# Altium PCB Sheet1.PcbDoc
Units mm, origin at the board's own origin, x right, y up, seen from the top; angles counter-clockwise.
Board outline 100 x 80.01 mm, 2 copper layers (Top Layer, Bottom Layer); 26 components, 36 nets, 136 pads, 13 vias.
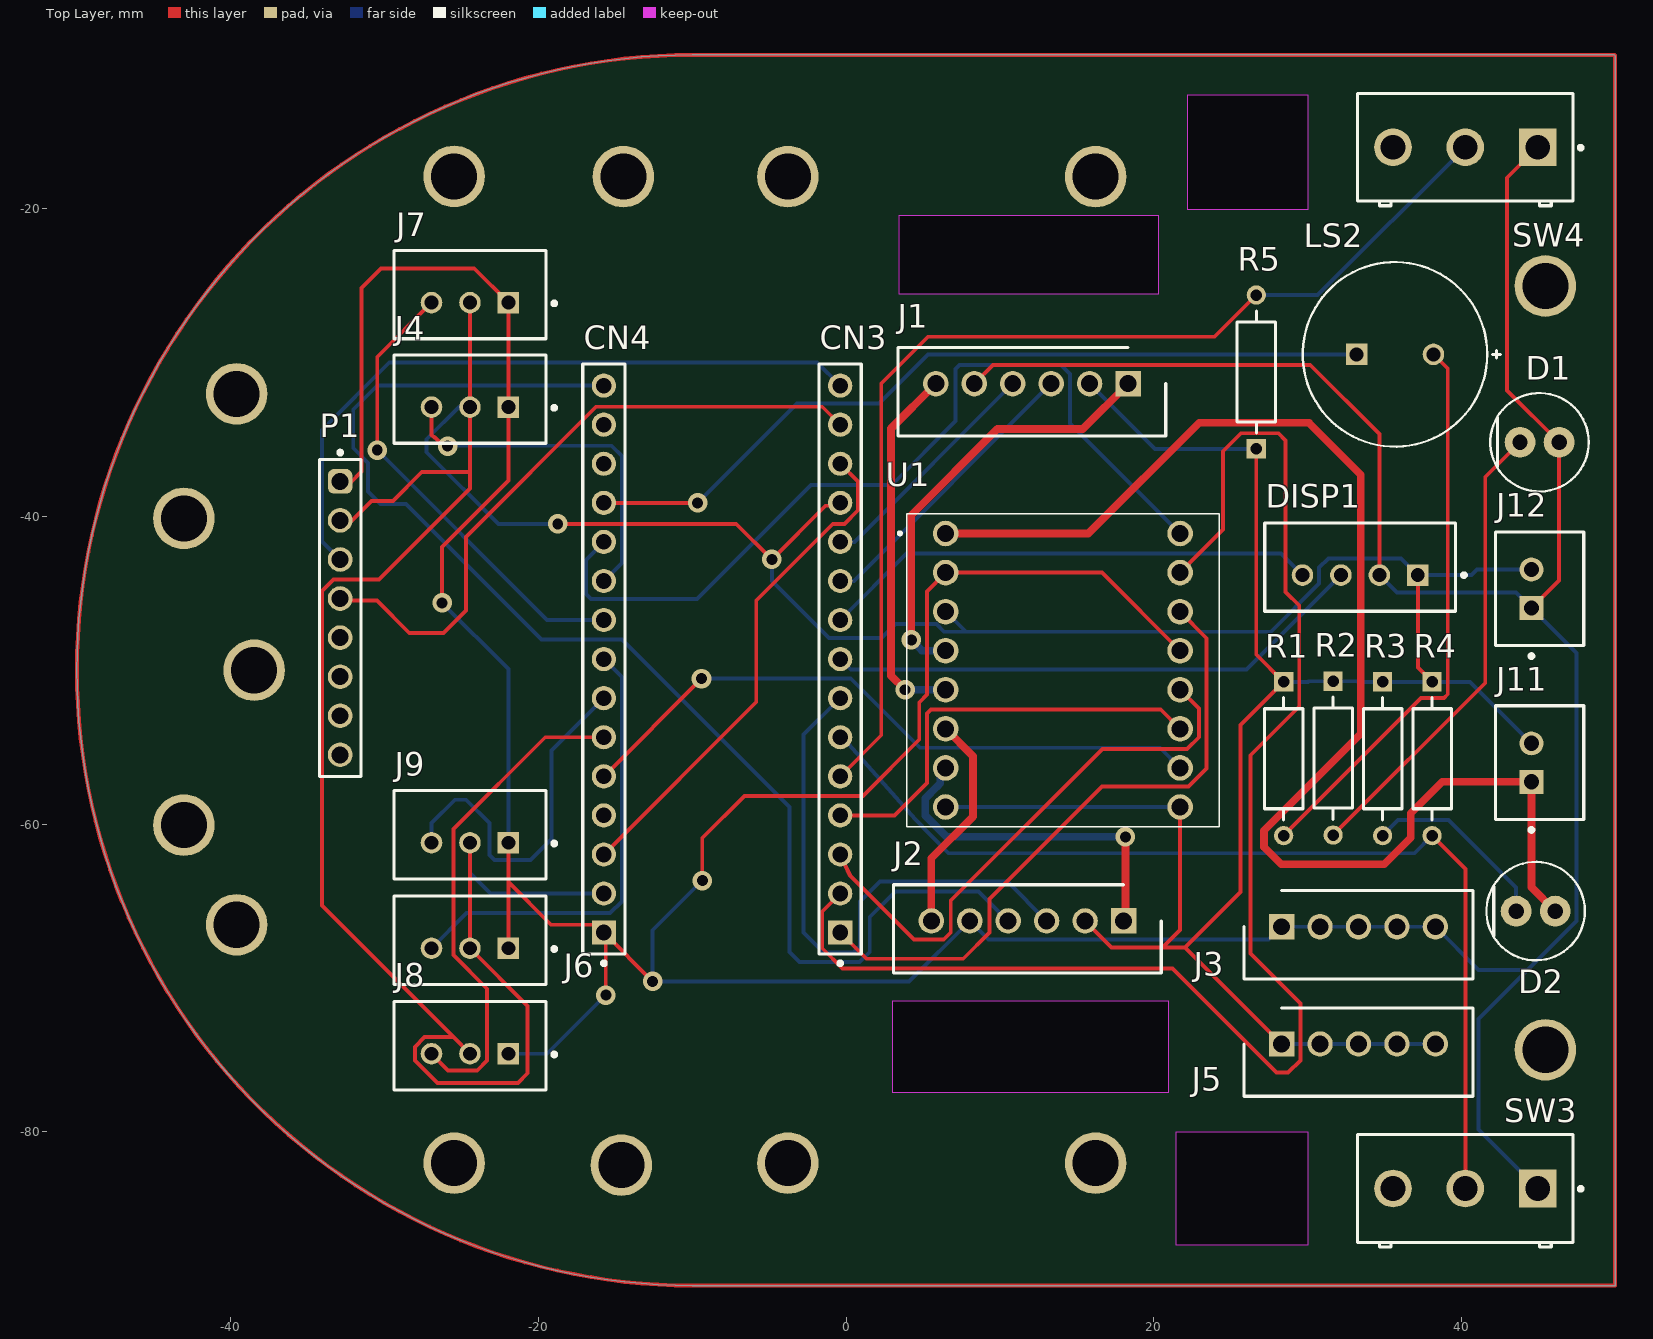
[diagram p0: Top Layer view]
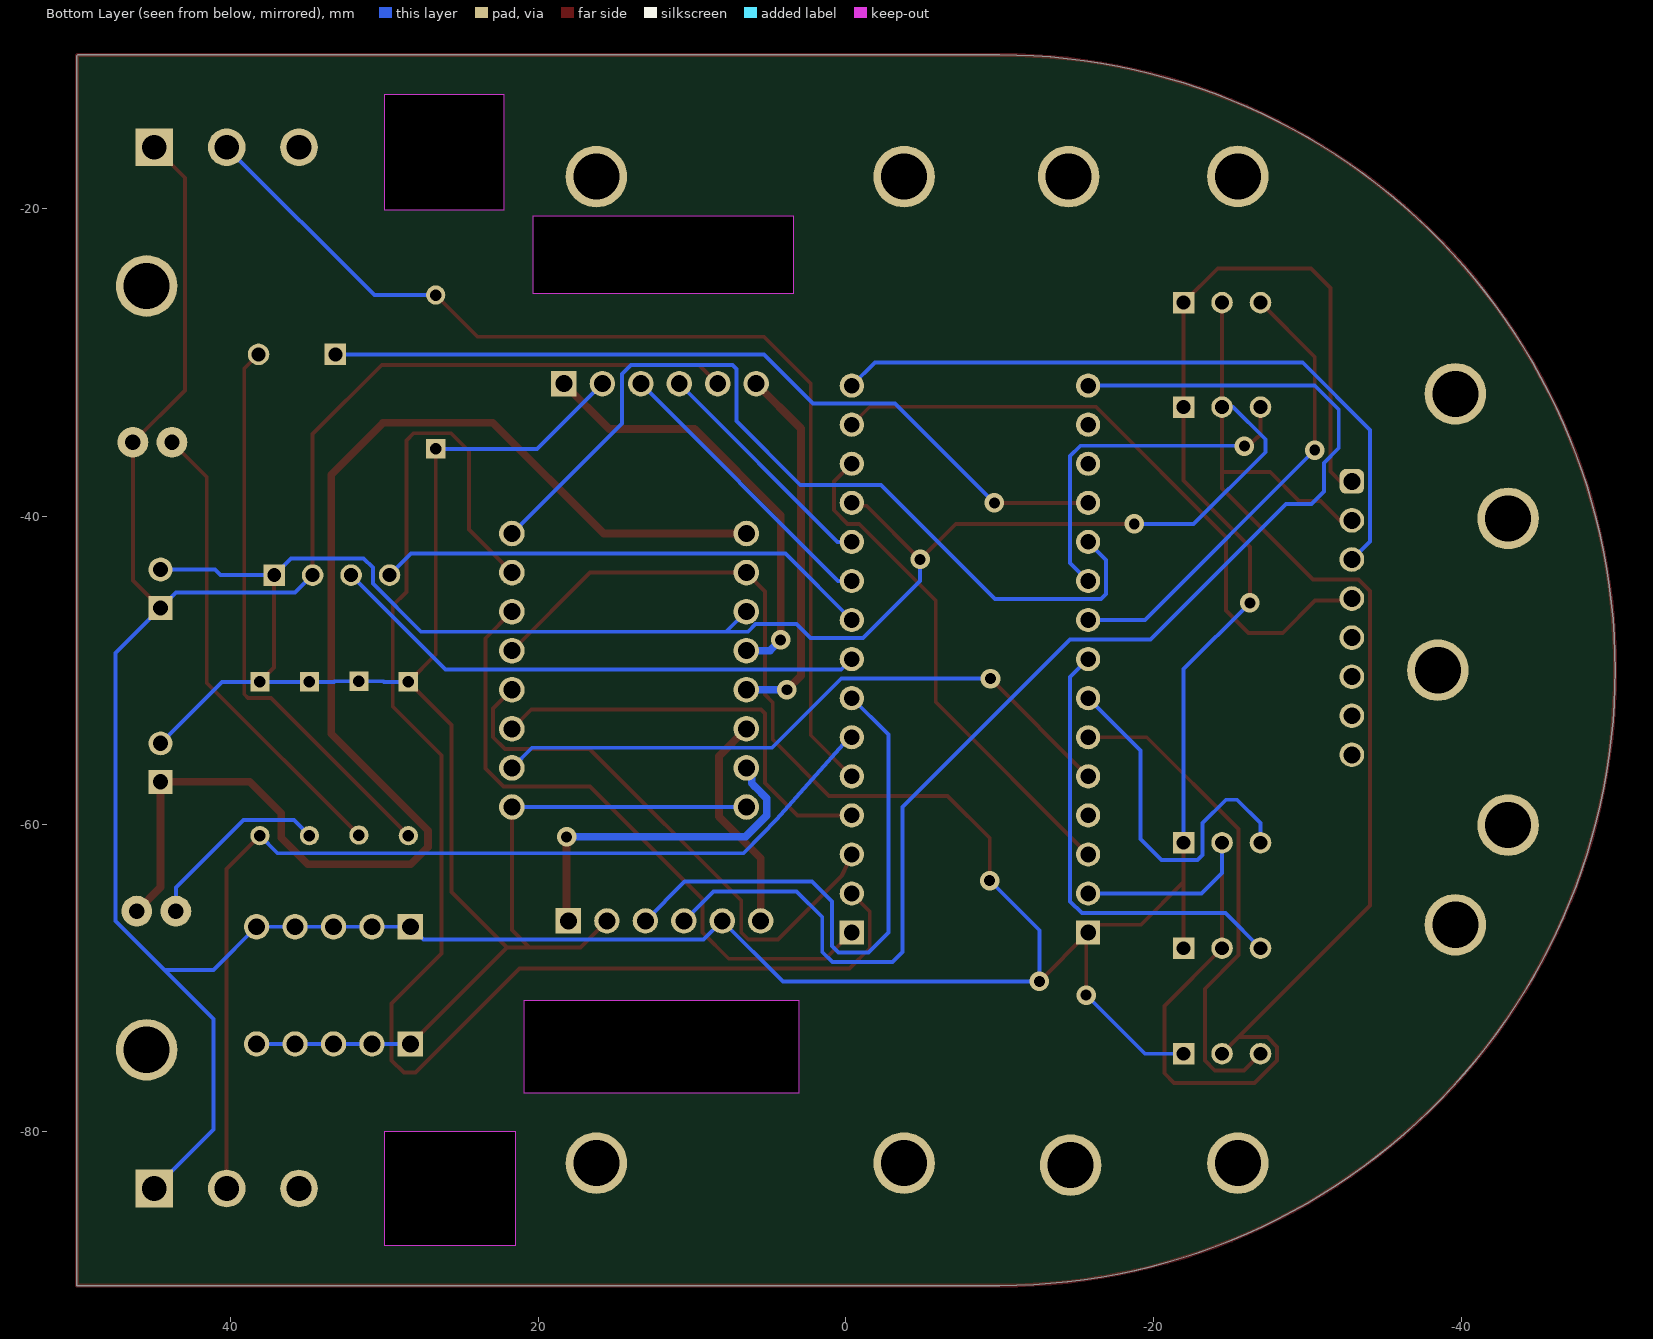
[diagram p1: Bottom Layer view, seen from below]
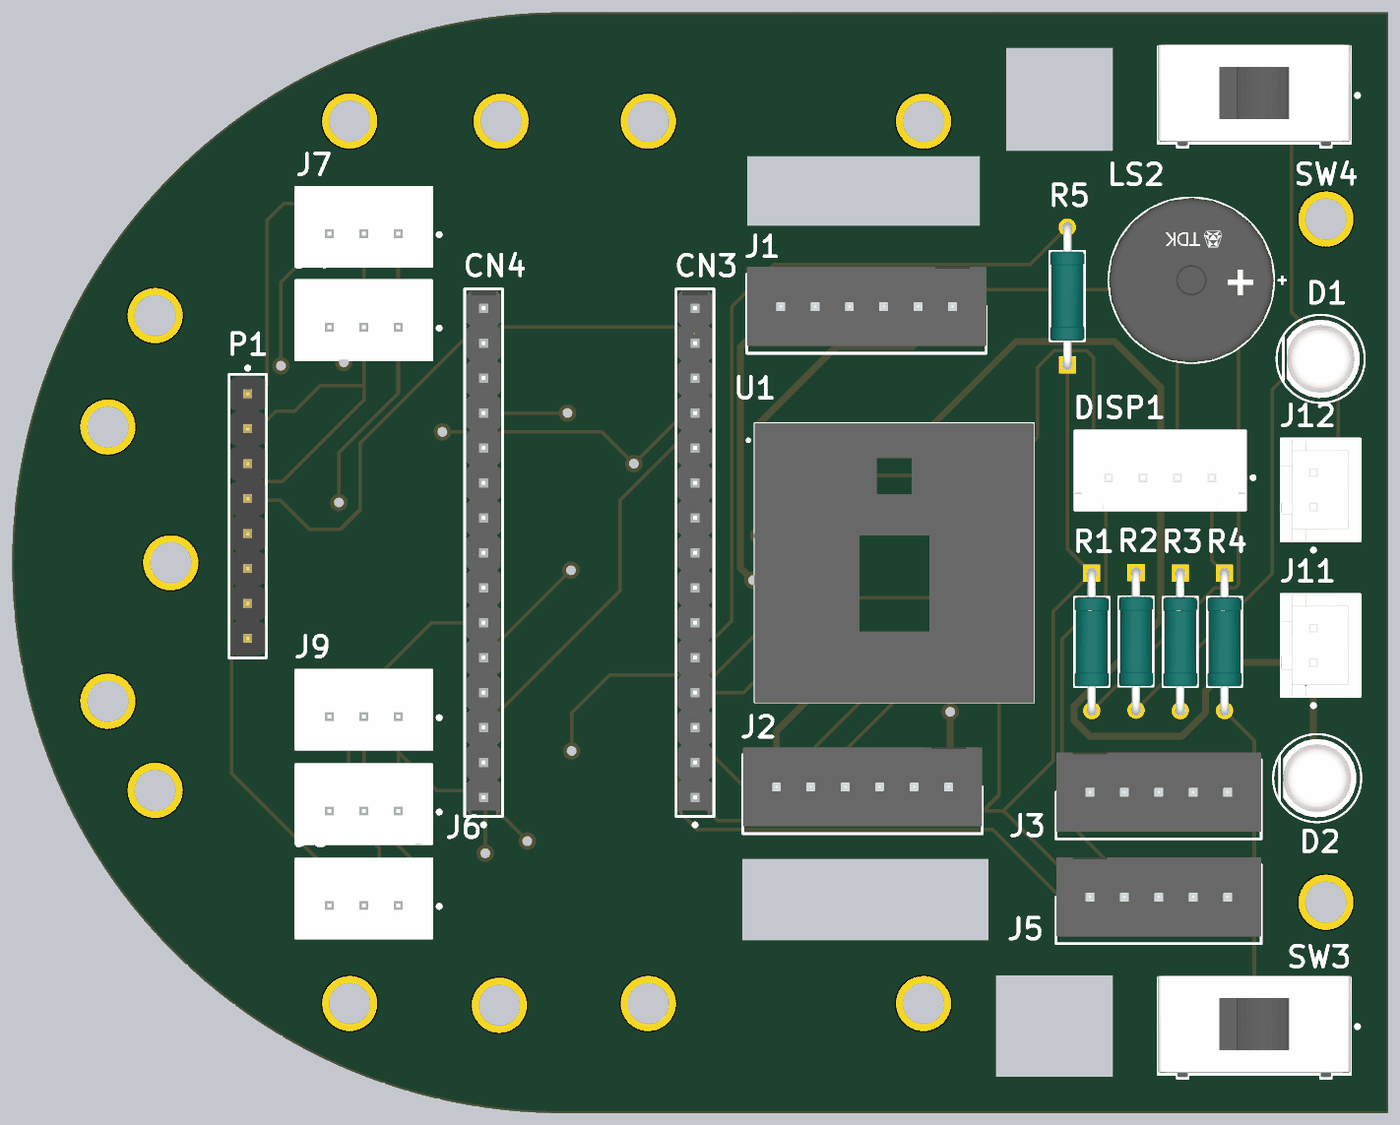
[diagram p2: 3D render of the assembled board from above, using the file's embedded part models]

## Layer stack, top to bottom
Top Solder: solder mask 0.0102, Solder Resist, Dk 3.5
Top Layer: signal copper 0.0356
Dielectric 1: dielectric 0.32, FR-4, Dk 4.8
Bottom Layer: signal copper 0.0356
Bottom Solder: solder mask 0.0102, Solder Resist, Dk 3.5

## Board outline
-50.006,-49.993 ccw(c-10.001,-49.999) -10.007,-90.005 49.993,-90.005 49.998,-90 49.998,-10.035 49.957,-9.994 -10,-9.994 -9.997,-9.994 ccw(c-10.002,-49.998)
cut-out: 21.463,-87.376 21.463,-80.01 30,-80.01 30,-87.376
cut-out: 3.048,-77.47 3.048,-71.501 20.955,-71.501 20.955,-77.47
cut-out: 3.429,-25.527 20.32,-25.527 20.32,-20.447 3.429,-20.447
cut-out: 22.225,-20.066 22.225,-12.573 30,-12.573 30,-20.066

## Design rules (kind name [scope] priority, off if disabled: settings)
Clearance [All] p1: gap=0.254 ignorepadtopadclearanceinfootprint=FALSE
PolygonConnect [All] p1: connectstyle=Relief reliefconductorwidth=0.254 reliefentries=4 polygonreliefangle="90 Angle" airgapwidth=0.254
RoutingVias [All] p1: holewidth=0.711 width=1.27 viastyle="Through Hole" minholewidth=0.711 minwidth=1.27 maxholewidth=0.711 maxwidth=1.27
SolderMaskExpansion Via [isViA] p1: expansion=0.102 istentingtop=TRUE
SolderMaskExpansion [All] p2: expansion=0.102 istentingtop=FALSE
Width [All] p1: maxlimit=0.5 minlimit=0.254 preferedwidth=0.254
30 further rules are at their usual default settings.

## Components (designator, comment, footprint, x,y, rotation, side; value= is the part's Value field where it differs from the comment)
CN3 "22-28-4157" FP-22-28-4157-MFG -0.381,-49.276 r90 top
CN4 "22-28-4157" FP-22-28-4157-MFG -15.748,-49.276 r90 top
D1 "SFH 4550" FP-SFH_4550-MFG 45.085,-35.179 r0 top
D2 "SFH 4550" FP-SFH_4550-MFG 44.831,-65.659 r0 top
DISP1 "B4B-XH-A(LF)(SN)" FP-B4B-XH-A_LF_SN-MFG 33.421,-43.29 r0 top
J1 "B6B-XH-A_LF__SN_" SHDR6W64P0X250_1X6_1740X575X700P 18.335,-31.369 r180 top
J2 "B6B-XH-A_LF__SN_" SHDR6W64P0X250_1X6_1740X575X700P 18.041,-66.294 r180 top
J3 "+5" SHDR5W64P0X250_1X5_1490X575X700P 28.314,-66.675 r180 top
J4 "3" FP-B3B-XH-A_LF_SN-MFG -24.451,-32.368 r180 top
J5 "GND" SHDR5W64P0X250_1X5_1490X575X700P 28.314,-74.295 r180 top
J6 "5" FP-B3B-XH-A_LF_SN-MFG -24.451,-67.547 r180 top
J7 "1" FP-B3B-XH-A_LF_SN-MFG -24.451,-25.575 r180 top
J8 "6" FP-B3B-XH-A_LF_SN-MFG -24.451,-74.405 r180 top
J9 "7" FP-B3B-XH-A_LF_SN-MFG -24.451,-60.689 r180 top
J11 "B2B-XH-A(LF)(SN)" FP-B2B-XH-A_LF_SN-MFG 45.085,-56.007 r90 top
J12 "B2B-XH-A(LF)(SN)" FP-B2B-XH-A_LF_SN-MFG 45.085,-44.704 r90 top
LS2 "SD1209T5-A1" FP-SD1209-MFG 35.687,-29.464 r0 top
P1 "61300811121" 61300811121 -32.893,-46.609 r270 top
R1 "R" FP-MRS25-MFG 28.448,-55.753 r270 top
R2 "MRS25000C9530FCT00" FP-MRS25-MFG 31.665,-55.716 r270 top
R3 "MRS25000C9530FCT00" FP-MRS25-MFG 34.883,-55.753 r270 top
R4 "MRS25000C9530FCT00" FP-MRS25-MFG 38.1,-55.753 r270 top
R5 "MRS25000C9530FCT00" FP-MRS25-MFG 26.67,-30.607 r90 top
SW3 "CS12ANW03" FP-CS12ANW03-MFG 40.259,-83.693 r180 top
SW4 "CS12ANW03" FP-CS12ANW03-MFG 40.259,-16.002 r180 top
U1 "ROB-14450" ROB14450 14.097,-50 r270 top

## Footprints (in the part's own frame and the unit in brackets; to place one, negate y for a bottom-side part, rotate by r counter-clockwise, add the part's x,y. Pads: shape width x height; smd on the part's side, far side on the other; paste and mask are expansions set on the pad)
61300811121 [mm] "Pin Header, pitch 2.54 mm, THT, Vertical, single row, 8p"
  rrect50% 1.6x1.6 hole 1.1: 1(-8.89,0)
  round 1.6 hole 1.1: 2(-6.35,0) 3(-3.81,0) 4(-1.27,0) 5(1.27,0) 6(3.81,0) 7(6.35,0) 8(8.89,0)
  silkscreen extent -10.88,-1.34 10.31,1.34, body extent -10.16,-1.27 10.16,1.27, height 8.57
FP-22-28-4157-MFG [mm]
  rect 1.57x1.57 hole 1.02 paste-2539.97 mask+0: 1(-17.78,0)
  round 1.57 hole 1.02 paste-2539.97 mask+0: 2(-15.24,0) 3(-12.7,0) 4(-10.16,0) 5(-7.62,0) 6(-5.08,0) 7(-2.54,0) 8(0,0) 9(2.54,0) 10(5.08,0) 11(7.62,0) 12(10.16,0) 13(12.7,0) 14(15.24,0) 15(17.78,0)
  silkscreen extent -19.9,-1.37 19.18,1.37, body extent -19.28,-1.47 19.28,1.47, height 0.25
FP-B2B-XH-A_LF_SN-MFG [mm]
  rect 1.55x1.55 hole 1 paste-2539.97 mask+0: 1(-1.25,0.525)
  round 1.55 hole 1 paste-2539.97 mask+0: 2(1.25,0.525)
  silkscreen extent -4.5,-2.88 3.7,2.87, body extent -3.8,-2.98 3.8,2.98, height 0.25
FP-B3B-XH-A_LF_SN-MFG [mm]
  rect 1.4x1.4 hole 0.9 paste-2539.97 mask+0: 1(-2.5,0.525)
  round 1.4 hole 0.9 paste-2539.97 mask+0: 2(0,0.525) 3(2.5,0.525)
  silkscreen extent -5.6,-2.88 4.95,2.87, body extent -5.05,-2.98 5.05,2.98, height 0.25
FP-B4B-XH-A_LF_SN-MFG [mm]
  rect 1.4x1.4 hole 0.9 paste-2539.97 mask+0: 1(3.75,-0.525)
  round 1.4 hole 0.9 paste-2539.97 mask+0: 2(1.25,-0.525) 3(-1.25,-0.525) 4(-3.75,-0.525)
  silkscreen extent -6.2,-2.88 6.88,2.87, body extent -6.3,-2.98 6.3,2.98, height 0.25
FP-CS12ANW03-MFG [mm]
  rect 2.45x2.45 hole 1.6 paste-2539.97 mask+0: 1(-4.7,0)
  round 2.45 hole 1.6 paste-2539.97 mask+0: 2(0,0) 3(4.7,0)
  silkscreen extent -7.63,-3.5 7,3.8, body extent -7.1,-3.6 7.1,3.91, height 0.25
FP-MRS25-MFG [mm]
  rect 1.25x1.25 hole 0.75 paste-2539.97 mask+0: 1(-5,0)
  round 1.25 hole 0.75 paste-2539.97 mask+0: 2(5,0)
  silkscreen extent -3.97,-1.25 3.97,1.25, body extent -5.72,-1.35 5.72,1.35, height 0.25
FP-SD1209-MFG [mm]
  rect 1.4x1.4 hole 0.9 paste-2539.97 mask+0: 1(-2.5,0)
  round 1.4 hole 0.9 paste-2539.97 mask+0: 2(2.5,0)
  silkscreen extent -6,-6 6.85,6, body extent -6.1,-6.1 6.1,6.1, height 0.25
FP-SFH_4550-MFG [mm]
  round 2 hole 1 paste-2539.97 mask+0: 1(-1.27,0) 2(1.27,0)
  silkscreen extent -3.2,-3.2 3.2,3.2, body extent -3.05,-3.05 3.05,3.05, height 0.25
ROB14450 [mm]
  round 1.665 hole 1.11: 1(-8.89,-7.62) 2(-6.35,-7.62) 3(-3.81,-7.62) 4(-1.27,-7.62) 5(1.27,-7.62) 6(3.81,-7.62) 7(6.35,-7.62) 8(8.89,-7.62) 9(-8.89,7.62) 10(-6.35,7.62) 11(-3.81,7.62) 12(-1.27,7.62) 13(1.27,7.62) 14(3.81,7.62) 15(6.35,7.62) 16(8.89,7.62)
  silkscreen extent -10.16,-10.7 10.16,10.16, body extent -10.16,-10.16 10.16,10.16, height 5.1
SHDR5W64P0X250_1X5_1490X575X700P [mm]
  rect 1.65x1.65 hole 1.1: 1(0,0)
  round 1.65 hole 1.1: 2(-2.5,0) 3(-5,0) 4(-7.5,0) 5(-10,0)
  silkscreen extent -12.45,-2.35 2.45,3.4, body extent -12.45,-2.88 2.45,2.88, height 7
SHDR6W64P0X250_1X6_1740X575X700P [mm]
  rect 1.65x1.65 hole 1.1: 1(0,0)
  round 1.65 hole 1.1: 2(2.5,0) 3(5,0) 4(7.5,0) 5(10,0) 6(12.5,0)
  silkscreen extent -2.45,-2.35 14.95,3.4, body extent -2.45,-2.88 14.95,2.88, height 7

## Part data
CN3 CN4: library part CMP-04776-000945-1, "KK 100 HDR ASSY BKWY 15 CKT 30 S", Color=Black, Contact Resistance=20mR, Current Rating=4A, Max Operating Temperature=75°C, Max Voltage Rating (DC)=250.25kV, Min Operating Temperature=0°C, Package Quantity=1, Voltage Rating=250V, Connector Type="Male Pin", Contact Material=Brass, Contact Mating Length=0.32inch, Contact Plating=Gold, Contact Type="Male Pin", Gender=Male, Glow Wire Compliant=Non-compliant, Housing Color=Black, Housing Material=Thermoplastic, Lead Free="Lead Free", Mount="Through Hole", Number of Circuits=15, Number of Contacts=15, Number of Positions=15, Number of Rows=1, Orientation=Straight, Packaging=Bulk, Pitch=2.54mm, Series="KK® 42375", Termination=Solder
D1 D2: library part CMP-62016-000011-1, "EMITTER IR 860NM 100MA RADIAL", Colour=Infrared, Forward Current=100mA, Forward Voltage=1.5V, Manufacturer="Osram Opto", Reverse Voltage=5V, Temperature="-40°C to +100°C", Temperature Range High=+100°C, Temperature Range Low=-40°C, Automotive=No, Category=Diode, ComponentLink2Description=Datasheet, ComponentLink2URL=https://dammedia.osram.info/media/resource/hires/osram-dam-5580407/SFH%204550_EN.pdf, Device Class L1=Optoelectronics, Device Class L2=LEDs, Device Class L3=unset, Digikey Description="EMITTER IR 860NM 100MA RADIAL", Lead Free=Yes, Led Orientation=Straight, Manufacturer Part Number="SFH 4550", Mouser Description="Infrared Emitters - High Power Infrared 850 nm HALF ANGLE +/-3DEG", Octopart=https://octopart.com/sfh+4550-osram+opto-55410894, Package="SFH 4550", Peak Emmision Wavelength=860nm, RoHS=TRUE, Viewing Angle=6°
DISP1: library part CMP-17439-000250-1, "CONN HEADER VERT 4POS 2.5MM", Color=Natural, Contact Resistance=20mR, Current Rating=3A, Flammability Rating="UL94 V-0", Housing Color=White, Insulation Resistance=1GR, Max Operating Temperature=85°C, Max Voltage Rating (AC)=250V, Min Operating Temperature=-25°C, Package Quantity=500, Connector Type=Header, Contact Finish - Mating=TIN, Contact Material=Brass, Contact Plating=Tin, Contact Shape=Square, Contact Type="Male Pin", Depth=5.75mm, Fastening Type=Detent, Gender=Male, Housing Material=Polyamide, Insulation Color=Natural, Insulation Material=Nylon, Lead Free="Lead Free", Lead Pitch=2.5mm, Length=12.4mm, Mated Stacking Heights=9.8mm, Material=Polyamide, Max Current Rating=3A, Max Voltage Rating (DC)=250V, Mount="Through Hole", Number of Contacts=4, Number of Positions=4, Number of Rows=1, Orientation=Straight, Packaging=Bulk, Pitch=2.5mm, REACH SVHC="No SVHC", Series=XH, Termination=Solder, Voltage Rating=250V, Voltage Rating (AC)=250V, Wire/Cable Gauge=22AWG
J1 J2: "Connector", Arrow Part Number=B6B-XH-A(LF)(SN), Manufacturer_Name="JST (JAPAN SOLDERLESS TERMINALS)", Arrow Price/Stock=https://www.arrow.com/en/products/b6b-xh-a-lf-sn/jst-manufacturing?utm_currency=USD&region=europe, Datasheet Link=https://datasheet.lcsc.com/szlcsc/JST-Sales-America-B6B-XH-A-LF-SN_C144397.pdf, Height=7mm, Manufacturer_Part_Number=B6B-XH-A(LF)(SN)
J3 J5: library part B5B-XH-A_LF__SN_, "Connector", Arrow Part Number=B5B-XH-A(LF)(SN), Manufacturer_Name="JST (JAPAN SOLDERLESS TERMINALS)", Arrow Price/Stock=https://www.arrow.com/en/products/b5b-xh-a-lf-sn/jst-manufacturing, Datasheet Link=http://www.jst-mfg.com/product/pdf/eng/eXH.pdf, Height=7mm, Manufacturer_Part_Number=B5B-XH-A(LF)(SN)
J4 J6 J7 J8 J9: library part CMP-17439-000014-3, "CONN HEADER VERT 3POS 2.5MM", Color=Natural, Contact Resistance=20mR, Current Rating=3A, Flammability Rating="UL94 V-0", Housing Color=White, Insulation Resistance=1GR, Max Operating Temperature=85°C, Max Voltage Rating (AC)=250V, Min Operating Temperature=-25°C, Connector Type=Header, Contact Finish - Mating=TIN, Contact Material=Brass, Contact Plating=Tin, Contact Shape=Square, Contact Type="Male Pin", Depth=5.75mm, Fastening Type=Detent, Gender=Male, Housing Material=Polyamide, Insulation Color=Natural, Insulation Material=Nylon, Lead Free="Lead Free", Lead Pitch=2.5mm, Length=9.9mm, Max Current Rating=3A, Max Voltage Rating (DC)=250V, Mount="Through Hole", Number of Contacts=3, Number of Positions=3, Number of Rows=1, Orientation=Straight, Packaging=Bulk, Pitch=2.5mm, REACH SVHC="No SVHC", Series=XH, Termination=Solder, Voltage Rating=250V, Voltage Rating (AC)=250V, Wire/Cable Gauge=22AWG
J11 J12: library part CMP-2000-05888-3, "CONN HEADER VERT 2POS 2.5MM", Color=Natural, Contact Resistance=20mR, Current Rating=3A, Housing Color=White, Insulation Resistance=1GR, Max Operating Temperature=85°C, Max Voltage Rating (AC)=250V, Min Operating Temperature=-25°C, Connector Type="Male Pin", Contact Material=Brass, Contact Plating=Tin, Contact Type="Male Pin", Depth=5.75mm, Fastening Type=Detent, Housing Material=Polyamide, Lead Free="Lead Free", Lead Pitch=2.5mm, Length=7.4mm, Max Current Rating=3A, Max Voltage Rating (DC)=250V, Mount="Through Hole", Number of Contacts=2, Number of Positions=2, Number of Rows=1, Orientation=Straight, Packaging=Bulk, Pitch=2.5mm, REACH SVHC="No SVHC", Series=XH, Termination=Solder, Voltage Rating=250V, Voltage Rating (AC)=250V, Wire/Cable Gauge=22AWG
LS2: library part CMP-08413-000009-1, "AUDIO MAGNETIC XDCR 3-6V TH", Current Rating=60mA, Frequency=2.048kHz, Max Operating Temperature=85°C, Min Operating Temperature=-40°C, Operating Supply Voltage=5V, Package Quantity=100, Self Resonant Frequency=2.05kHz, Diameter=12mm, Height=9mm, Lead Free="Lead Free", Max Supply Current=60mA, Mount="Through Hole", Number of Pins=2, Number of Terminals/Pins=2, Operating Supply Current=60mA, Packaging=Tray, Sensing Method=Magnetic, Series=SD, Termination="PC Pins", Voltage Rating (DC)=5V, Washable=No
P1: library part CMP-1502-01076-3, Color=Black, Contact Resistance=20mΩ, Current Rating=3A, Max Operating Temperature=105°C, Min Operating Temperature=-40°C, Operating Supply Voltage=250V, Connector Type="Male Pin", Contact Material=Copper, Contact Mating Length=5.9944mm, Contact Plating=Gold, Gender=Male, Height=8.54mm, Lead Pitch=2.54mm, Mount="Through Hole", NexarPartId=32855533, Number of Contacts=8, Number of Pins=8, Number of Positions=8, Number of Rows=1, Orientation=Vertical, Packaging=Bulk, Pitch=2.54mm, REACH SVHC=Unknown, RoHS=Compliant, Termination=Solder, Voltage Rating=250V
R1 R2 R3 R4 R5: library part CMP-02408-000049-1, "RES 953 OHM 0.6W 1% AXIAL", Case/Package=Axial, Max Operating Temperature=155°C, Max Power Dissipation=600mW, Min Operating Temperature=-55°C, Resistance=953R, Resistance Tolerance=1%, Resistor Type="Metal Film", Temperature Coefficient=50ppm/°C, Voltage Rating=350V, Construction=Cylindrical, Contact Plating=Tin, Diameter=2.5mm, Lead Free="Lead Free", Lead Length=26mm, Length=6.5mm, Military Standard=Not, Number of Terminations=2, Packaging="Tape and Reel", Power Rating=600mW, Radiation Hardening=No, RoHS Compliant=Yes, Series=MRS25, Technology="THIN FILM", Termination=Axial, Tolerance=1%, Width=2.5mm
SW3 SW4: library part CMP-31746-000002-1, "SWITCH SLIDE SPDT 3A 125V", Contact Current Rating=3A, Flammability Rating="UL94 V-0", Max Operating Temperature=85°C, Max Voltage Rating (AC)=250V, Min Operating Temperature=-30°C, Package Quantity=1, Voltage Rating (AC)=125V, Actuator Length=5.1mm, Actuator Material=Nylon, Actuator Type=Standard, Contact Material=Copper, Contact Plating=Silver, Contact Style=Non-Shorting, Current Rating=3A, Depth=7.5mm, Electrical Life=20000Cycles, Illumination Type=Non-Illuminated, Lead Free="Lead Free", Length=14mm, Max Current Rating=3A, Mechanical Life=50000Cycles, Mount="Through Hole", Orientation=Vertical, Packaging=Tray, Primary Type=SWITCH, Reach SVHC Compliant=Yes, RoHS Compliant=Yes, Series=CS, Switch Function=On-On, Switch Travel=2.2mm, Termination="PC Pin", Throw Configuration=SPDT
U1: "Undefined or Miscellaneous", Manufacturer_Name=SparkFun, Mouser Part Number=474-ROB-14450, Arrow Part Number=ROB-14450, Arrow Price/Stock=https://www.arrow.com/en/products/rob-14450/sparkfun-electronics?region=nac, Datasheet Link=https://www.sparkfun.com/products/14450, Height=5mm, Manufacturer_Part_Number=ROB-14450, Mouser Price/Stock=https://www.mouser.co.uk/ProductDetail/SparkFun/ROB-14450?qs=wd5RIQLrsJhQdlH%2FW5H2aQ%3D%3D

## Free pads (board coordinates)
  round 4 hole 3: 3(45.466,-25.019) 4(16.223,-17.907) 4(45.466,-74.676) 6(-3.777,-17.907) 7(-39.619,-32.032) 8(-43.053,-40.132) 9(-43.053,-60.071) 10(-39.619,-66.548) 11(-25.479,-82.042) 12(-3.777,-82.042) 13(16.223,-82.042) 14(-25.479,-17.892) 15(-38.481,-50) 16(-14.478,-17.907) 17(-14.605,-82.169)

## Via types
v1: diameter 1.27, hole 0.711, Top Layer to Bottom Layer, tented both sides, 13 vias

## Nets (pads, with @x,y where several pads share a name; then routed paths per layer and width w, separated by ;. In a path a pad name is that pad's centre, name@x,y a point inside that pad or via, vN(x,y) a via of type N, cw(c..) or ccw(c..) an arc to the next point about the centre after c; other vN are vias at no path point)
+3V3: CN4.14
+5V: CN4.1 D1.2 DISP1.2 J1.5 J2.5 J3.1 J3.2 J3.3 J3.4 J3.5 J4.1 J6.1 J7.1 J8.1 J9.1 J12.1 P1.1 SW3.1 SW4.1 U1.2 U1.12 | length 336.3
  Top Layer w0.254: P1.1 -32.766,-37.846 -32.258,-37.846 -31.496,-37.084 -31.496,-25.146 -30.226,-23.876 -24.175,-23.876 J7.1 J4.1 -21.951,-37.674 -26.264,-41.986 v1(-26.264,-45.618) ; J6.1 -21.946,-68.072 -21.946,-63.717 -21.951,-63.712 ; J9.1 -21.951,-63.778 -19.181,-66.548 -15.748,-66.548 CN4.1 ; v1(-15.621,-71.12) -15.621,-67.183 CN4.1 ; v1(-12.573,-70.231) CN4.1 ; v1(-9.347,-63.678) -9.347,-60.909 -6.604,-58.166 1.092,-58.166 4.755,-54.503 4.755,-52.088 5.258,-51.586 5.258,-44.869 U1.2 16.637,-43.65 U1.12 ; J1.5 9.554,-30.15 30.175,-30.15 34.671,-34.646 DISP1.2 ; J12.1 46.355,-44.159 D1.2 42.977,-31.801 42.977,-17.984 SW4.1
  Bottom Layer w0.254: v1(-26.264,-45.618) -21.951,-49.931 J9.1 ; J8.1 -19.431,-74.93 v1(-15.621,-71.12) ; v1(-9.347,-63.678) -12.573,-66.904 v1(-12.573,-70.231) 4.104,-70.231 J2.5 9.26,-67.513 27.476,-67.513 J3.1 J3.2 J3.3 J3.4 J3.5 41.123,-69.484 44.308,-69.484 ; DISP1.2 35.814,-44.958 43.564,-44.958 J12.1 47.498,-48.892 47.498,-66.294 44.308,-69.484 ; SW3.1 41.123,-79.857 41.123,-72.669 44.308,-69.484
+6V: D2.2 J11.1 U1.1 | length 88.2
  Top Layer w0.5: U1.1 15.753,-41.11 22.954,-33.909 30.091,-33.909 33.467,-37.285 33.467,-54.13 27.165,-60.432 27.165,-61.488 28.288,-62.611 34.976,-62.611 36.703,-60.884 36.703,-59.309 38.755,-57.257 J11.1 44.56,-64.118 D2.2
AVDD: CN4.13
GND: CN3.12 CN4.2 DISP1.1 J1.2 J2.2 J4.2 J5.1 J5.2 J5.3 J5.4 J5.5 J6.2 J7.2 J8.2 J9.2 J11.2 J12.2 P1.2 R1.1 R2.1 R3.1 R4.1 R5.1 U1.3 U1.8 U1.16 | length 326.2
  Top Layer w0.254: P1.2 -32.766,-40.386 -32.258,-40.386 -30.858,-38.986 -29.461,-38.986 -27.584,-37.109 -24.451,-37.109 ; J8.2 -25.532,-73.849 ; J9.2 J6.2 -20.701,-71.822 -20.701,-76.2 -21.336,-76.835 -26.575,-76.835 -28.032,-75.378 -28.032,-74.482 -27.399,-73.849 -25.532,-73.849 ; J7.2 J4.2 -24.451,-37.109 ; v1(-18.745,-40.488) -7.137,-40.488 v1(-4.826,-42.799) -1.332,-39.305 -0.57,-39.305 CN3.12 ; J2.2 17.268,-68.021 20.574,-68.021 ; U1.16 21.717,-66.878 20.574,-68.021 ; R5.1 26.67,-48.975 R1.1 25.654,-53.547 25.654,-64.407 22.04,-68.021 ; J5.1 22.04,-68.021 ; DISP1.1 37.171,-49.824 R4.1 ; -25.532,-73.849 -34.074,-65.307 -34.074,-44.85 -33.331,-44.107 -30.372,-44.107 -24.451,-38.186 -24.451,-37.109 ; 20.574,-68.021 22.04,-68.021
  Bottom Layer w0.254: J9.2 -24.451,-63.179 -23.114,-64.516 CN4.2 ; J4.2 -25.175,-32.893 -27.265,-34.983 -27.265,-35.825 -22.602,-40.488 v1(-18.745,-40.488) ; v1(-4.826,-42.799) -4.826,-44.196 -1.118,-47.904 2.315,-47.904 3.226,-46.994 5.867,-46.994 6.372,-47.498 7.785,-47.498 ; U1.8 U1.16 ; U1.3 7.785,-47.498 ; J1.2 20.073,-35.607 R5.1 ; J5.1 J5.2 J5.3 J5.4 J5.5 ; R1.1 30.023,-50.753 30.06,-50.716 R2.1 33.249,-50.716 33.285,-50.753 R3.1 R4.1 40.556,-50.753 J11.2 ; J12.2 41.026,-43.454 40.665,-43.815 DISP1.1 36.079,-42.723 31.369,-42.723 30.759,-43.332 30.759,-44.374 27.635,-47.498 7.785,-47.498
LO1: J1.1 U1.4 | length 28.3
  Top Layer w0.5: v1(4.242,-48.031) 4.242,-39.914 9.84,-34.315 15.389,-34.315 J1.1
  Bottom Layer w0.5: v1(4.242,-48.031) 4.94,-48.73 U1.4
LO2: J1.6 U1.5 | length 24.1
  Top Layer w0.5: v1(3.835,-51.27) 2.921,-50.356 2.921,-34.283 J1.6
  Bottom Layer w0.5: v1(3.835,-51.27) U1.5
NetD1_1: D1.1 R2.2 | length 30.6
  Top Layer w0.254: R2.2 41.554,-50.827 41.554,-37.44 D1.1
NetD2_1: D2.1 R3.2 | length 12.4
  Bottom Layer w0.254: R3.2 35.895,-59.741 39.167,-59.741 43.561,-64.135 D2.1
NetLS2_2: LS2.2 R1.2 | length 37
  Top Layer w0.254: R1.2 37.385,-51.816 38.862,-51.816 39.116,-51.562 39.116,-30.393 LS2.2
NRST: CN3.13 CN4.3 | length 33.2
  Top Layer w0.254: CN4.3 -5.842,-52.07 -5.842,-45.468 -0.864,-40.49 -0.104,-40.49 0.785,-39.601 0.785,-37.742 CN3.13
PA0: CN4.12 LS2.1 | length 52.9
  Top Layer w0.254: CN4.12 v1(-9.652,-39.116)
  Bottom Layer w0.254: v1(-9.652,-39.116) -3.198,-32.662 2.136,-32.662 5.334,-29.464 LS2.1
PA1: CN4.11 U1.9 | length 57.4
  Bottom Layer w0.254: CN4.11 -16.916,-42.824 -16.916,-45.034 -16.586,-45.364 -9.703,-45.364 -2.286,-37.948 2.972,-37.948 7.112,-33.807 7.112,-30.404 7.366,-30.15 13.97,-30.15 14.554,-30.734 14.554,-33.947 U1.9
PA2: CN4.5 U1.15 | length 42.5
  Top Layer w0.254: CN4.5 v1(-9.398,-50.546)
  Bottom Layer w0.254: v1(-9.398,-50.546) 0.305,-50.546 4.801,-55.042 20.409,-55.042 U1.15
PA3: CN4.10 J4.3 | length 23.4
  Top Layer w0.254: J4.3 -26.951,-34.695 -26.766,-34.879 -26.737,-34.879 -26.183,-35.433 v1(-25.908,-35.433)
  Bottom Layer w0.254: v1(-25.908,-35.433) -25.883,-35.408 -15.24,-35.408 -14.58,-36.068 -14.58,-43.028 CN4.10
PA4: CN4.9 J7.3 | length 30.4
  Top Layer w0.254: v1(-30.48,-35.687) -30.48,-29.629 J7.3
  Bottom Layer w0.254: v1(-30.48,-35.687) -19.431,-46.736 CN4.9
PA5: CN4.8 J6.3 | length 29.9
  Bottom Layer w0.254: J6.3 -24.665,-65.786 -15.342,-65.786 -14.58,-65.024 -14.58,-50.444 CN4.8
PA6: CN4.7 J9.3 | length 23.6
  Bottom Layer w0.254: J9.3 -26.951,-59.944 -25.427,-58.42 -24.714,-58.42 -23.19,-59.944 -23.19,-62.001 -22.86,-62.332 -20.523,-62.332 -19.152,-60.96 -19.152,-55.22 CN4.7
PA7: CN4.6 J8.3 | length 32.5
  Top Layer w0.254: J8.3 -25.87,-76.011 -23.976,-76.011 -23.343,-75.378 -23.343,-70.709 -25.532,-68.52 -25.532,-60.33 -19.558,-54.356 CN4.6
PA8: CN3.4 U1.14 | length 28.1
  Top Layer w0.254: CN3.4 3.155,-59.436 5.263,-57.328 5.263,-52.801 5.512,-52.553 20.46,-52.553 U1.14
PA9: CN3.15 P1.3 | length 45
  Bottom Layer w0.254: P1.3 -34.074,-41.618 -34.074,-34.372 -29.7,-29.997 -1.88,-29.997 CN3.15
PA10: CN3.14 P1.4 | length 42.8
  Top Layer w0.254: P1.4 -32.766,-45.466 -32.258,-45.466 -30.507,-45.466 -28.398,-47.574 -26.162,-47.574 -24.714,-46.126 -24.714,-41.326 -16.256,-32.868 -1.549,-32.868 CN3.14
PA11: CN3.3 U1.13 | length 36.2
  Top Layer w0.254: CN3.3 0.254,-63.348 4.42,-67.513 6.35,-67.513 6.807,-67.056 6.807,-64.973 16.662,-55.118 22.174,-55.118 22.936,-54.356 22.936,-52.489 U1.13
PA12: CN3.11 J1.4 | length 15.5
  Bottom Layer w0.254: CN3.11 0.548,-41.656 J1.4
PB0: CN3.10 J1.3 | length 19
  Bottom Layer w0.254: CN3.10 0.508,-44.196 J1.3
PB1: CN3.7 J2.3 | length 37.2
  Bottom Layer w0.254: CN3.7 -2.755,-54.19 -2.755,-67.056 -1.466,-68.345 0.489,-68.345 0.908,-67.926 0.908,-65.024 2.197,-63.735 10.482,-63.735 J2.3
PB3: CN4.15 J2.4 | length 86.5
  Bottom Layer w0.254: CN4.15 -30.48,-31.496 -32.042,-33.058 -32.042,-35.562 -31.077,-36.527 -31.077,-38.392 -30.264,-39.205 -28.614,-39.205 -19.813,-48.006 -14.554,-48.006 -3.679,-58.881 -3.679,-68.313 -3.016,-68.976 -1.48,-68.976 0.874,-68.976 1.539,-68.311 1.539,-66.04 3.205,-64.374 8.621,-64.374 J2.4
PB4: CN3.1 U1.11 | length 41.8
  Top Layer w0.254: CN3.1 1.321,-68.758 7.62,-68.758 9.322,-67.056 9.322,-64.872 16.63,-57.564 22.269,-57.564 23.444,-56.388 23.444,-47.917 U1.11
PB5: CN3.2 U1.10 | length 95.9
  Top Layer w0.254: CN3.2 -1.549,-65.684 -1.549,-68.072 -0.229,-69.393 21.223,-69.393 27.988,-76.158 28.744,-76.158 29.54,-75.362 29.54,-71.653 26.289,-68.402 26.289,-55.524 29.464,-52.349 29.464,-45.796 28.575,-44.907 28.575,-35.052 28.118,-34.595 25.679,-34.595 24.511,-35.763 24.511,-40.856 U1.10
PB6: CN3.8 DISP1.3 | length 35.4
  Bottom Layer w0.254: CN3.8 0.305,-49.962 26.024,-49.962 DISP1.3
PB7: CN3.9 DISP1.4 | length 32.4
  Bottom Layer w0.254: CN3.9 3.937,-42.418 28.274,-42.418 DISP1.4
PF0: CN3.6 R4.2 SW3.2 | length 66.1
  Top Layer w0.254: R4.2 40.259,-62.912 SW3.2
  Bottom Layer w0.254: CN3.6 -0.251,-54.356 -0.102,-54.505 4.51,-59.705 5.455,-60.685 6.67,-61.9 36.953,-61.9 R4.2
PF1: CN3.5 R5.2 SW4.2 | length 71
  Top Layer w0.254: CN3.5 2.29,-54.225 2.29,-31.365 5.334,-28.321 23.956,-28.321 R5.2
  Bottom Layer w0.254: R5.2 30.654,-25.607 SW4.2
RO1: J2.1 U1.7 | length 22.9
  Top Layer w0.254: J2.1 J2.1@18.161,-66.174
  Top Layer w0.5: J2.1@18.161,-66.174 v1(18.161,-60.833)
  Bottom Layer w0.5: 5.992,-57.493 cw(c5.628,-57.15) 5.923,-57.554 ; 6.127,-57.114 cw(c5.628,-57.15) 6.128,-57.144 ; U1.7 6.127,-56.7 6.128,-57.144 ; v1(18.161,-60.833) 6.53,-60.833 5.141,-59.444 5.141,-58.336 5.923,-57.554 ; 5.923,-57.554 6.127,-57.35 6.128,-57.153 ; 6.128,-57.153 ccw(c5.628,-57.15) 6.128,-57.144 ; 6.128,-57.153 6.128,-57.144
RO2: J2.6 U1.6 | length 14.3
  Top Layer w0.5: J2.6 5.541,-62.226 8.255,-59.512 8.255,-55.588 U1.6
VOUT: CN4.4
pads on no net: P1.5 P1.6 P1.7 P1.8 SW3.3 SW4.3
copper on no net: | length 325.7
  Top Layer w0.254: -10,-9.994 49.957,-9.994 49.998,-10.035 49.998,-90 49.993,-90.005 -10.007,-90.005 cw(c-10.001,-49.999) -50.006,-49.993 cw(c-10.002,-49.998) -9.997,-9.994

## Silkscreen, mask and mechanical layers (free items; w line width, h text height)
Mechanical 1:
  pour cut-out: 22.225,-20.066 22.225,-12.573 30,-12.573 30,-20.066
  lines w0.254: -1.524,-90 -1.46,-90 ; 3.048,-77.47 3.048,-71.501 20.955,-71.501 20.955,-77.47 3.048,-77.47 ; 3.429,-25.527 3.429,-20.447 20.32,-20.447 20.32,-25.527 3.429,-25.527 ; 21.463,-87.376 21.463,-80.01 30,-80.01 30,-87.376 21.463,-87.376 ; 22.225,-20.066 22.225,-12.573 30,-12.573 30,-20.066 22.225,-20.066